# Altium PCB openadsb_rev_a.PcbDoc
Units mm, origin at the board's own origin, x right, y up, seen from the top; angles counter-clockwise.
Board outline 61.47 x 18.69 mm, 4 copper layers (Top Layer, Ground plane, Power plane, Bottom Layer), stack 1.565 mm thick; 87 components, 58 nets, 281 pads, 274 vias.
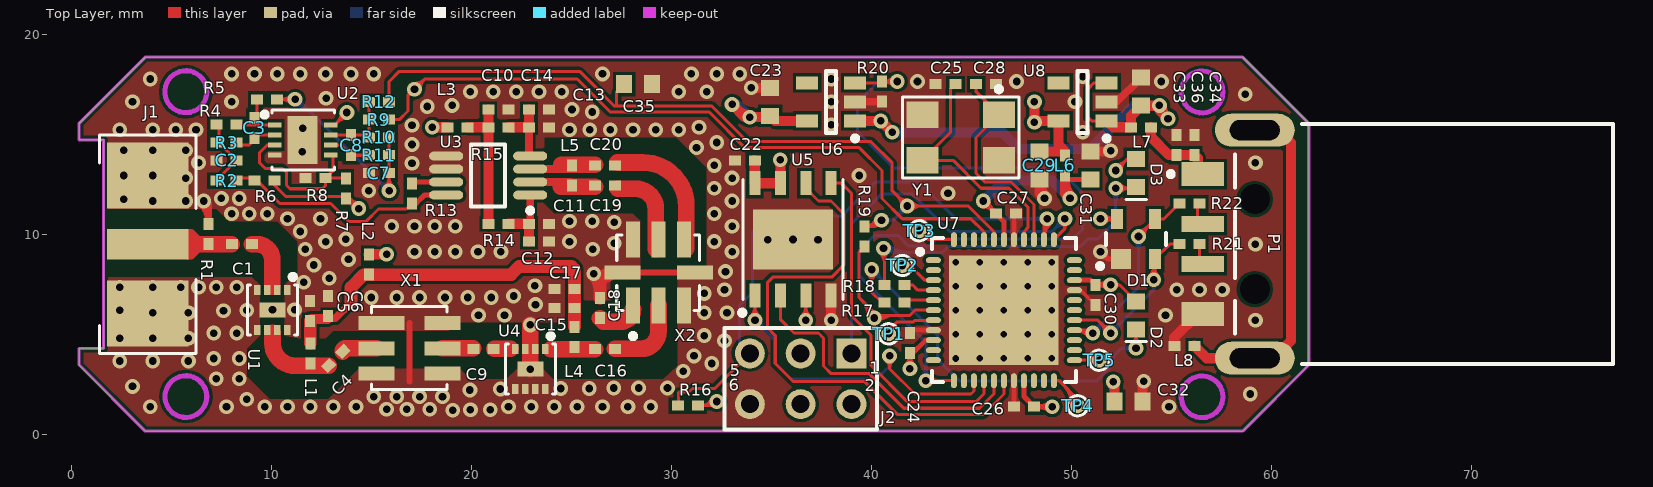
[diagram p0: Top Layer view]
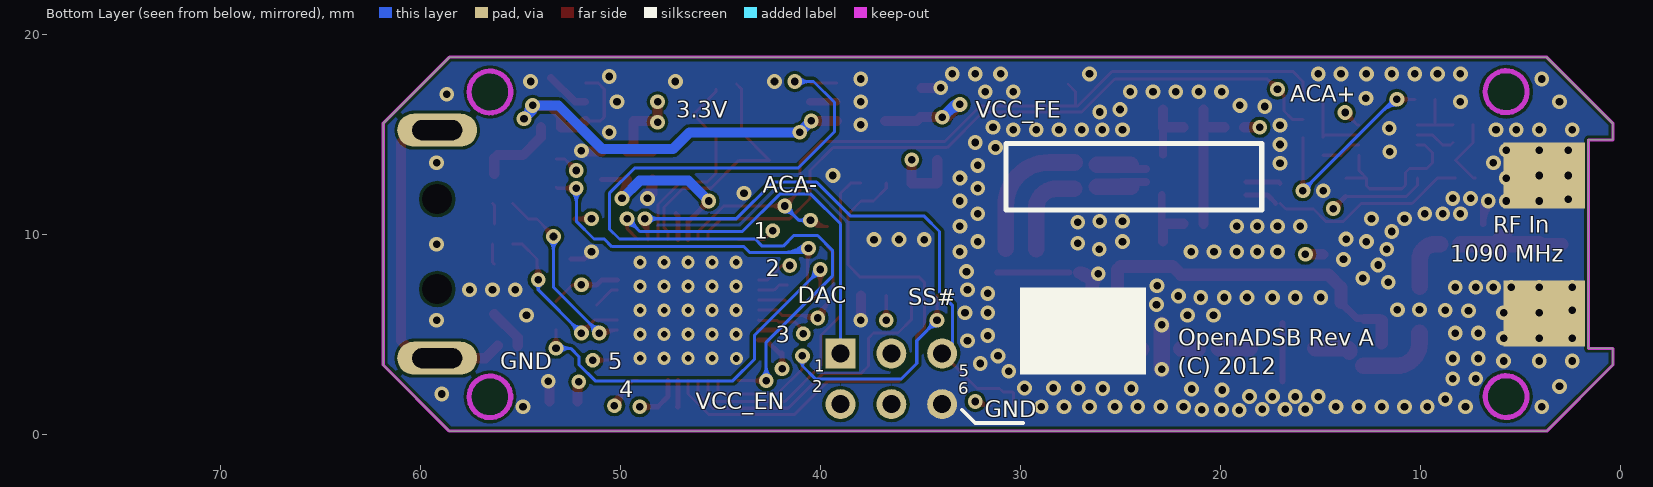
[diagram p1: Bottom Layer view, seen from below]
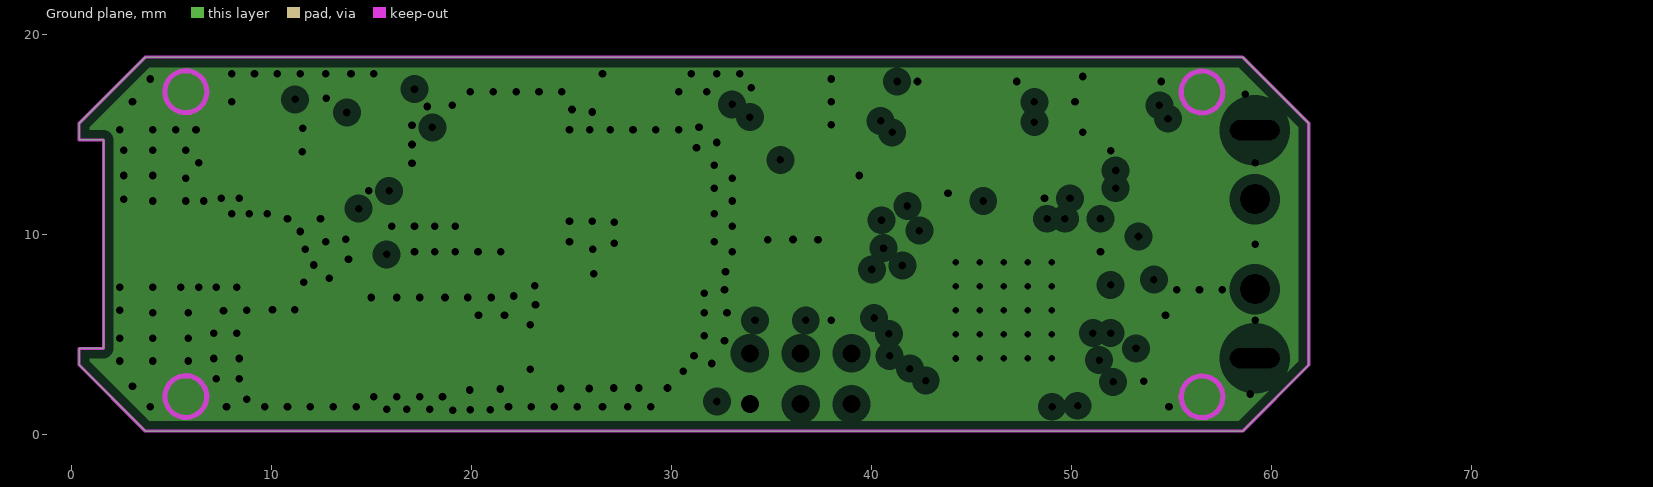
[diagram p2: Ground plane, clearances drawn from the general rule]
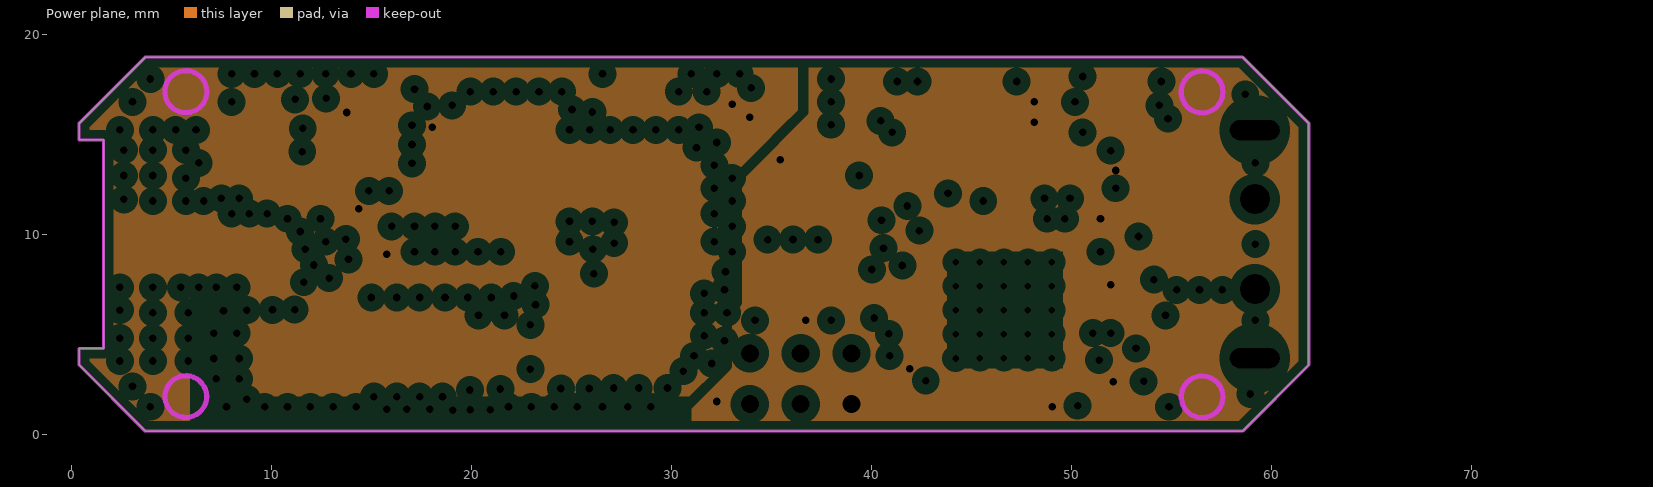
[diagram p3: Power plane, clearances drawn from the general rule]

## Layer stack, top to bottom
Top Layer: signal copper 0.0356
Dielectric: core 0.508, FR-4, Dk 4.8
Ground plane: plane copper 0.0356, net GND
Dielectric: prepreg 0.4064, FR-4, Dk 4.8
Power plane: plane copper 0.0356, net (Multiple Nets)
Dielectric: core 0.508, FR-4, Dk 4.8
Bottom Layer: signal copper 0.0356

## Board outline
0.381,3.48 0.381,4.318 1.6,4.318 1.6,14.732 0.381,14.732 0.381,15.57 3.683,18.872 58.547,18.872 61.849,15.57 61.849,3.48 58.547,0.178 3.683,0.178

## Design rules (kind name [scope] priority, off if disabled: settings)
Clearance [All] p1: gap=0.152
PlaneClearance [All] p1: clearance=0.508
PlaneConnect [All] p1: planeconnectstyle=Direct reliefexpansion=0.508 reliefentries=4 reliefconductorwidth=0.254 reliefairgap=0.254
PolygonConnect [All] p1: connectstyle=Direct reliefconductorwidth=0.254 reliefentries=4 polygonreliefangle="90 Angle" airgapwidth=0.254
RoomDefinition openadsb_rev_a [InComponentClass('openadsb_rev_a')] p1: confinementstyle=ConfineIn formatcopy=TRUE lockcomponents=FALSE outline 61.595,2.73 318.135,2.73 318.135,25.59 61.595,25.59
RoutingVias [All] p1: holewidth=0.381 width=0.737 viastyle="Through Hole" minholewidth=0.381 minwidth=0.737 maxholewidth=0.711 maxwidth=1.27
SilkscreenOverComponentPads [All] p1: minsilkscreentomaskgap=0.254
SolderMaskExpansion [All] p1: expansion=0.102
Width [All] p1: maxlimit=2.54 minlimit=0.152 preferedwidth=0.152 minimp=50.000000 maximp=50.000000 favimp=50.000000
25 further rules are at their usual default settings.

## Components (designator, comment, footprint, x,y, rotation, side; value= is the part's Value field where it differs from the comment)
C1 "100p" 0402 8.509,9.525 r0 top
C2 "12p" 0402 7.747,13.716 r0 top
C3 "4.7p" 0402 9.144,15.342 r90 top
C4 "39p" 0402 13.208,3.81 r45 top
C5 "100p" 0402 11.913,6.172 r90 top
C6 "22n" 0402 12.827,6.426 r90 top
C7 "56p" 0402 15.367,13.081 r0 top
C8 "10p" 0402 13.97,14.478 r90 top
C9 "39p" 0402 20.599,4.293 r0 top
C10 "100n" 0402 21.336,16.256 r0 top
C11 "100p" 0402 23.368,10.541 r0 top
C12 "100n" 0402 23.368,9.652 r0 top
C13 "100p" 0402 23.368,15.367 r180 top
C14 "100n" 0402 23.368,16.256 r180 top
C15 "100p" 0402 24.638,6.325 r180 top
C16 "39p" 0402 26.67,4.293 r0 top
C17 "22n" 0402 24.638,7.29 r180 top
C18 "39p" 0402 26.416,6.325 r270 top
C19 "2.7p" 0402 26.67,12.446 r180 top
C20 "2.7p" 0402 26.67,13.462 r180 top
C22 "100n" 0402 33.655,13.716 r180 top
C23 "2.2 uF" 1608[0603] 34.925,16.637 r90 top (schematic designator C35)
C24 "100n" 0402 41.91,4.572 r90 top
C25 "7 p" 0402 43.688,17.526 r0 top
C26 "100n" 0402 47.625,1.397 r180 top
C27 "100n" 0402 46.711,11.049 r0 top
C28 "7 p" 0402 45.72,17.526 r180 top
C29 "2.2 uF" 1608[0603] 48.387,13.462 r270 top
C30 "100n" 0402 51.181,6.985 r270 top
C31 "2.2 uF" 1608[0603] 50.927,13.462 r90 top
C32 "2.2 uF" 1608[0603] 52.832,1.651 r0 top
C33 "4.7 uF" 1608[0603] 53.467,17.145 r90 top
C34 "100 p" 0402 56.134,14.478 r90 top
C35 "2.2 uF" 1608[0603] 28.321,17.526 r0 top (schematic designator C23)
C36 "100n" 0402 55.245,14.478 r90 top
D1 "PACDN004-D" SOT-143-RC4_L 53.213,9.779 r90 top
D2 "GREEN" LED0603 53.213,5.969 r270 top
D3 "RED" LED0603 53.213,13.081 r270 top
J1 "SMA end-launch" SMA_ENDLAUNCH 3.81,12.065 r0 top
J2 "Header 3X2" HDR2X3 38.989,4.064 r180 top
L1 "82 nH" 0402 11.938,4.064 r90 top
L2 "Ferrite bead" 0402 14.859,8.509 r270 top
L3 "Ferrite bead" 0402 19.304,15.367 r0 top
L4 "82 nH" 0402 25.146,4.877 r90 top
L5 "8.2 nH" 0402 25.019,12.954 r270 top
L6 "Ferrite bead >220ohms @ 100MHz" 0402 49.657,13.462 r90 top
L7 "Ferrite bead >220ohms @ 100MHz" 0402 53.467,15.367 r0 top
L8 "Ferrite bead >220ohms @ 100MHz" 0402 55.626,4.445 r180 top
P1 "1470695-4" 1470695A 61.849,9.525 r0 top
R1 "10K" 0402 6.858,10.033 r90 top
R2 "6.98K" 0402 7.747,12.7 r180 top
R3 "7.87K" 0402 7.747,14.605 r0 top
R4 "6.98K" 0402 7.747,15.494 r0 top
R5 "2.26K" 0402 9.779,16.764 r180 top
R6 "5.6K" 0402 9.652,12.7 r0 top
R7 "4.7k" 0402 13.716,12.319 r90 top
R8 "4.7k" 0402 12.192,12.827 r180 top
R9 "47K" 0402 15.367,15.748 r180 top
R10 "2.26K" 0402 15.367,14.859 r0 top
R11 "1.96K" 0402 15.367,13.97 r180 top
R12 "47K" 0402 15.367,16.637 r180 top
R13 "4.7k" 0402 17.018,12.065 r90 top
R14 "10" 0402 21.336,10.541 r180 top
R15 "10" 0402 21.336,15.367 r180 top
R16 "10K" 0402 30.81,1.448 r180 top
R17 "470" 0402 41.148,6.604 r180 top
R18 "680" 0402 41.148,7.493 r180 top
R19 "100K" 0402 39.649,9.906 r270 top
R20 "47K" 0402 40.513,17.145 r90 top
R21 "27" 0402 55.88,9.538 r0 top
R22 "27" 0402 55.88,11.557 r0 top
TP1 "Testpoint" Testpoint_via 40.856,5.042 r90 top
TP2 "Testpoint" TESTPOINT_VIA 41.529,8.458 r90 top
TP3 "Testpoint" TESTPOINT_VIA 42.38,10.198 r90 top
TP4 "Testpoint" TESTPOINT_VIA 50.292,1.448 r90 top
TP5 "Testpoint" TESTPOINT_VIA 51.373,3.723 r90 top
U1 "SPF-5122Z" DFN8_2X2MM 10.045,6.239 r270 top
U2 "LT1801IDD" DFN8_3X3MM 11.557,14.732 r0 top
U3 "AD8313" MSOP-MS8_N 20.828,12.954 r180 top
U4 "SGL-0622Z" DFN8_2X2MM 22.936,3.277 r270 top
U5 "SST25VF010A" WSON-8 34.163,6.858 r90 top
U6 "TPS79942DDCR" SOT23-5AN 37.973,16.637 r180 top
U7 "ATXMEGA16A4U-MH" QFN50P700X700-44W3N 46.609,6.223 r0 top
U8 "TPS79933DDCR" SOT23-5AN 50.546,16.637 r180 top
X1 "STA1090EC" STA1090EC 14.986,6.223 r0 top
X2 "STA0232A" STA0232A 27.432,6.198 r90 top
Y1 "8.000 MHz" ABM3C 46.355,13.716 r180 top

## Footprints (in the part's own frame and the unit in brackets; to place one, negate y for a bottom-side part, rotate by r counter-clockwise, add the part's x,y. Pads: shape width x height; smd on the part's side, far side on the other; paste and mask are expansions set on the pad)
0402 [mm] "Chip Capacitor, Body 1.0x0.5mm, IPC High Density"
  rect 0.6x0.5 smd: 1(-0.5,0) 2(0.5,0)
  body extent -0.55,-0.3 0.55,0.3, height 1.3
1608[0603] [mm] "Chip Capacitor, Body 1.6x0.8mm, IPC High Density"
  rect 0.8x0.9 smd: 1(-0.7,0) 2(0.7,0)
  body extent -0.87,-0.48 0.87,0.48, height 1.3
1470695A [mm] "Connector; USB1.1, Type A, SM; 4 Position; Right Angle"
  rect 2.1x1.2 smd: 1(-5.3,3.5) 4(-5.3,-3.5)
  rect 2.1x0.8 smd: 2(-5.3,1) 3(-5.3,-1)
  oval 4x1.65 hole 1 slot 2.5 at 0 deg: 5(-2.7,-5.7) 6(-2.7,5.7)
  round 1.2 hole 1.5 unplated: MH1(-2.7,-2.25) MH2(-2.7,2.25)
  silkscreen extent -7.02,-6 15.2,6
ABM3C [mil]
  rect 63x52 smd: 1(0,-90) 2(150,-90) 3(150,0) 4(0,0)
  silkscreen extent -40,-145 190,35
DFN8_2X2MM [mm]
  rect 0.5x0.325 smd: 1(-1,0.75) 2(-1,0.25) 3(-1,-0.25) 4(-1,-0.75) 5(1,-0.75) 6(1,-0.25) 7(1,0.25) 8(1,0.75)
  rect 0.749x1.3 smd: 9(0,0)
  silkscreen extent -1.78,-1.25 1.25,1.25
DFN8_3X3MM [mm]
  rect 0.675x0.25 smd: 1(-1.41,0.75) 2(-1.41,0.25) 3(-1.41,-0.25) 4(-1.41,-0.75) 5(1.41,-0.75) 6(1.41,-0.25) 7(1.41,0.25) 8(1.41,0.75)
  rect 1.5x2.38 smd: 9(-0.004,0)
  silkscreen extent -2.03,-1.5 1.6,1.5
HDR2X3 [mm] "Connector; Header; 3x2 Position"
  rect 1.5x1.5 hole 0.9: 1(0,0)
  round 1.5 hole 0.9: 2(0,2.54) 3(2.54,0) 4(2.54,2.54) 5(5.08,0) 6(5.08,2.54)
  silkscreen extent -1.27,-1.27 6.35,3.81
LED0603 [mm] "Chip Capacitor, Body 1.6x0.8mm, IPC High Density"
  rect 0.8x0.9 smd: A(-0.7,0) K(0.7,0)
  silkscreen extent 1.32,-0.51 1.32,0.53, body extent -0.87,-0.48 0.87,0.48, height 1.3
MSOP-MS8_N [mm] "TSOP, 8-Leads, Body 3x3mm, Pitch 0.65mm, IPC Medium Density"
  oval 1.7x0.45 smd: 1(-2.1,0.975) 2(-2.1,0.325) 3(-2.1,-0.325) 4(-2.1,-0.975) 5(2.1,-0.975) 6(2.1,-0.325) 7(2.1,0.325) 8(2.1,0.975)
  silkscreen extent -2.22,-1.55 0.85,1.87, body extent -1.6,-1.6 1.6,1.6, height 1.1
QFN50P700X700-44W3N [mm] "QFN, 44-Leads, Body 7x7mm, Pitch 0.5mm, IPC Medium Density"
  oval 0.75x0.3 smd: 1(-3.525,2.5) 2(-3.525,2) 3(-3.525,1.5) 4(-3.525,1) 5(-3.525,0.5) 6(-3.525,0) 7(-3.525,-0.5) 8(-3.525,-1) 9(-3.525,-1.5) 10(-3.525,-2) 11(-3.525,-2.5) 23(3.525,-2.5) 24(3.525,-2) 25(3.525,-1.5) 26(3.525,-1) 27(3.525,-0.5) 28(3.525,0) 29(3.525,0.5) 30(3.525,1) 31(3.525,1.5) 32(3.525,2) 33(3.525,2.5)
  oval 0.3x0.75 smd: 12(-2.5,-3.525) 13(-2,-3.525) 14(-1.5,-3.525) 15(-1,-3.525) 16(-0.5,-3.525) 17(0,-3.525) 18(0.5,-3.525) 19(1,-3.525) 20(1.5,-3.525) 21(2,-3.525) 22(2.5,-3.525) 34(2.5,3.525) 35(2,3.525) 36(1.5,3.525) 37(1,3.525) 38(0.5,3.525) 39(0,3.525) 40(-0.5,3.525) 41(-1,3.525) 42(-1.5,3.525) 43(-2,3.525) 44(-2.5,3.525)
  rect 5.475x5.475 smd: 45(0,0)
  silkscreen extent -4.31,-3.6 3.6,3.6, body extent -3.57,-3.57 3.57,3.57, height 0.8
SMA_ENDLAUNCH [mil]
  rect 160x60 smd: 1(0,-100)
  rect 160x130 all layers, no hole: 2(0,-236.22) 2(0,35.43)
  silkscreen extent -95,-315 95,115
SOT23-5AN [mm] "SOT23, 5-Leads, Body 2.9x1.6mm, Pitch 0.95mm, Lead Span 2.8mm, IPC Medium Density"
  rect 1.1x0.65 smd: 1(-1.2,0.95) 2(-1.2,0) 3(-1.2,-0.95) 4(1.2,-0.95) 5(1.2,0.95)
  silkscreen extent -1.33,-1.55 0.25,1.95, body extent -0.9,-1.55 0.9,1.55, height 1.45
SOT-143-RC4_L [mm] "SOT143, 4-Leads, Body 2.9x1.3mm, Pitch 1.9mm, Lead Span 2.4mm, IPC High Density"
  rect 1x1 smd: 1(-1,0.75)
  rect 1x0.6 smd: 2(-1,-0.95) 3(1,-0.95) 4(1,0.95)
  silkscreen extent -1.47,-1.5 0.3,1.92, body extent -0.7,-1.52 0.7,1.52, height 1.22
STA0232A [mm]
  rect 1.8x0.7 smd: 1(0.254,-0.635) 2(0.254,-1.905) 3(0.254,-3.175) 5(3.556,-3.175) 6(3.556,-1.905) 7(3.556,-0.635)
  rect 0.7x1.8 smd: 4(1.905,-3.734) 8(1.905,-0.102)
  silkscreen extent -1.4,-3.96 3.79,0.18
STA1090EC [mm]
  rect 2.3x0.7 smd: 1(0.508,-0.635)
  rect 1.8x0.7 smd: 2(0.254,-1.905) 3(0.254,-3.175) 4(3.556,-3.175) 5(3.556,-1.905) 6(3.556,-0.635)
  silkscreen extent 0,-3.96 3.79,0.18
Testpoint_via [mil]
  round 29 hole 15: 1(0,0)
  silkscreen extent -20,-20 20,20
TESTPOINT_VIA [mil]
  round 29 hole 15: 1(0,0)
  silkscreen extent -20,-20 20,20
WSON-8 [mm]
  rect 1.2x0.55 smd: 1(0.1,0) 2(0.1,-1.27) 3(0.1,-2.54) 4(0.1,-3.81) 5(5.715,-3.81) 6(5.715,-2.54) 7(5.715,-1.27) 8(5.715,0)
  rect 3x4 smd: 9(2.9,-1.9)
  silkscreen extent -0.89,-4.4 5.9,0.76

## Part data
C1 C2 C3 C4 C5 C6 C7 C8 C9 C10 C11 C12 C13 C14 C15 C16 C17 C18 C19 C20 C22 C23 C24 C25 C26 C27 C28 C29 C30 C31 C32 C33 C34 C35 C36: library part Cap, "Capacitor"
D1: library part PACDN004, "ESD protection"
D2 D3: library part LED3, "Typical BLUE SiC LED"
J1: library part SMB, "SMB Straight Connector"
J2: "Header, 3-Pin, Dual row"
L1 L4 L5: library part Inductor, "Inductor"
L2 L3 L6 L7 L8: library part "Inductor Iron", "Magnetic-Core Inductor"
P1: "USB 1.1, Right Angle, SMT, A Type, Plug, 4 Position, Black"
R1 R2 R3 R4 R5 R6 R7 R8 R9 R10 R11 R12 R13 R14 R15 R16 R17 R18 R19 R20 R21 R22: library part Res1, "Resistor"
U1: library part LNA1
U2: library part LT1801
U3: "AD8313 Logarithmic Amp"
U4: library part SGL0622Z
U5: library part SERFLASH
U6 U8: library part TPS799XX
U7: library part ATXMEGA164AU
X1: library part BP_FILTER_UNBAL
X2: library part BP_FILTER_BAL2
Y1: library part XTAL_4

## Free pads (board coordinates)
  round 0 all layers, no hole: MNT(5.715,1.905) MNT(5.715,17.145) MNT(56.515,1.892) MNT(56.515,17.132)

## Via types
v1: diameter 0.737, hole 0.381, Top Layer to Bottom Layer, tented both sides, 233 vias
v2: diameter 0.66, hole 0.33, Top Layer to Bottom Layer, 25 vias
v3: diameter 0.737, hole 0.381, Top Layer to Bottom Layer, 15 vias
v4: diameter 0.737, hole 0.381, Top Layer to Bottom Layer, tented top, 1 vias

## Nets (pads, with @x,y where several pads share a name; then routed paths per layer and width w, separated by ;. In a path a pad name is that pad's centre, name@x,y a point inside that pad or via, vN(x,y) a via of type N, cw(c..) or ccw(c..) an arc to the next point about the centre after c; other vN are vias at no path point)
3V3: C22.1 C24.1 C26.1 C29.1 C30.1 C32.1 D1.4 D2.A D3.A J2.2 L6.2 R16.1 U5.3 U5.7 U5.8 U7.9 U7.19 U7.31 U8.5 | length 31
  Top Layer w0.152: 31.709,1.448 ccw(c31.709,1.914) v1@32.131,1.718 ; 31.947,1.448 ccw(c31.947,1.803) v1@32.27,1.654 ; v1@31.993,1.782 cw(c31.47,2.024) 31.47,1.448 32.047,1.448 v1(32.258,1.659) v1@32.258,1.778 ; v1@36.496,5.922 ccw(c35.998,6.42) 36.703,6.42 ccw(c37.408,6.42) v1@36.91,5.922 ; v1(36.703,5.715) U5.3 ; v1(51.943,7.493) 51.951,7.485 52.397,7.485 ; v1(52.197,13.208) 52.77,13.781 D3.A ; v1@52.197,13.5 ccw(c52.197,14.205) 52.696,13.707 ccw(c53.194,13.208) v1@52.489,13.208 ; v1@52.206,7.365 cw(c52.397,7.272) 52.397,7.485 ; v1@52.212,7.607 ccw(c52.397,7.686) 52.397,7.485 ; D2.A 52.397,7.485
  Top Layer w0.254: v1@41.739,3.473 ccw(c41.327,3.885) 41.91,3.885 ccw(c42.493,3.885) v1@42.081,3.473 ; v1(41.91,3.302) C24.1 42.045,4.072 42.696,4.723 U7.9 ; U7.19 47.609,1.913 C26.1 v1(49.022,1.397) ; v1@48.851,1.226 ccw(c48.439,0.814) 48.439,1.397 ccw(c48.439,1.98) v1@48.851,1.568 ; U7.31 50.943,7.723 C30.1 51.189,7.493 v1(51.943,7.493) ; v1(51.435,10.795) 51.451,10.779 D1.4 ; v1@51.606,10.624 cw(c51.979,10.251) D1.4@51.979,10.779 ; v1@51.606,10.966 ccw(c52.056,11.416) D1.4@52.056,10.779 ; v1@51.772,7.322 ccw(c51.36,6.91) 51.36,7.493 ccw(c51.36,8.076) v1@51.772,7.664
  Top Layer w0.508: U5.8@34.155,12.581 C22.1 ; U5.8 U5.7 v1(35.433,13.741) ; v3(48.133,16.637) v3(48.133,15.621) 48.199,15.687 U8.5 49.346,14.473 49.657,14.162 C29.1 ; v3@48.214,15.54 cw(c48.568,15.186) 48.568,15.687 ; v1@51.989,2.586 cw(c51.644,2.241) 52.132,2.241 ; v1@52.07,2.667 52.132,2.605 C32.1
  other v1: 52.07,2.642
ACA_N: C35.1 R12.1 R19.1 U7.40 | length 46.4
  Top Layer w0.152: R12.1 15.867,17.645 16.383,18.161 25.4,18.161 27.127,16.434 27.305,16.434 ; C35.1 27.24,17.145 27.24,16.499 27.305,16.434 ; R19.1@39.861,10.406 ccw(c39.861,10.927) v1@40.355,10.763 ; 40.072,10.406 ccw(c40.072,10.857) v1@40.5,10.715 ; v1@40.21,10.811 cw(c39.649,10.997) R19.1 40.175,10.406 ; v1@40.217,10.61 cw(c40.041,10.54) 40.175,10.406 ; v1@40.379,10.448 ccw(c40.308,10.272) 40.175,10.406 ; v1(40.488,10.719) 40.175,10.406 ; v3@41.491,11.43 ccw(c40.786,11.43) 41.284,11.929 ccw(c41.783,12.427) v3@41.783,11.722 ; v3@41.99,11.223 cw(c42.488,10.725) 42.488,11.43 cw(c42.488,12.135) v3@41.99,11.637 ; U7.40 46.109,10.152 44.831,11.43 v3(41.783,11.43) 41.021,12.192 41.021,13.589 39.954,14.656 33.781,14.656 32.003,16.434 27.305,16.434
  Bottom Layer w0.152: v1(40.488,10.719) 41.072,10.719 ; v1@40.721,10.544 cw(c41.072,10.281) 41.072,10.719 ; v1@40.721,10.894 ccw(c41.072,11.157) 41.072,10.719 ; v3@41.491,11.43 cw(c40.786,11.43) 41.284,10.931 cw(c41.783,10.433) v3@41.783,11.138 ; v3(41.783,11.43) 41.072,10.719
ACA_P: R9.1 U7.41 | length 37.9
  Top Layer w0.152: R9.1 16.383,15.748 16.815,16.18 16.815,16.942 ; v3@16.869,17.177 cw(c16.654,17.102) 16.815,16.942 ; v3@16.872,17.167 cw(c16.687,17.095) 16.828,16.955 ; v3@17.04,16.999 ccw(c16.968,16.814) 16.828,16.955 ; v3@17.05,16.996 ccw(c16.975,16.781) 16.815,16.942 ; v3(17.145,17.272) 16.815,16.942 ; v3@17.145,17.564 ccw(c17.145,18.269) 17.644,17.771 ccw(c18.142,17.272) v3@17.437,17.272 ; U7.41 45.609,10.144 44.958,10.795 41.529,10.795 40.513,11.811 40.513,13.208 39.37,14.351 33.655,14.351 31.877,16.129 26.924,16.129 25.273,17.78 17.653,17.78 16.828,16.954
D+: P1.3 R21.2 | length 1
  Top Layer w0.152: P1.3@56.295,8.525 56.38,8.61 R21.2
D-: P1.2 R22.2 | length 1.1
  Top Layer w0.152: P1.2@56.295,10.525 56.295,11.472 R22.2
DACB: R19.2 U7.6 | length 11.1
  Top Layer w0.152: 39.433,6.795 cw(c38.471,5.833) v3@39.831,5.833 ; R19.2 39.37,9.127 39.37,6.858 v3@40.259,5.969 ; 39.693,6.535 cw(c38.991,5.833) v3@39.984,5.833 ; 39.953,6.275 cw(c39.511,5.833) v3@40.136,5.833 ; v3(40.123,5.833) v3@40.259,5.969 ; v3@40.222,5.735 cw(c40.788,5.168) 40.788,5.969 ; v3@40.33,5.627 cw(c41.156,4.8) 41.156,5.969 ; v3@40.33,6.04 ccw(c40.501,6.211) 40.501,5.969 ; U7.6 42.164,6.223 41.91,5.969 v3@40.259,5.969
GND: C2.1 C5.2 C6.2 C7.1 C10.2 C11.2 C12.2 C13.1 C14.1 C15.2 C17.2 C18.1 C22.2 C23.2 C24.2 C25.1 C26.2 C27.2 C28.1 C29.2 C30.2 C31.2 C32.2 C33.2 C34.2 C35.2 C36.2 D1.1 J1.2 J2.6 L8.2 P1.4 R1.2 R8.2 R20.1 U1.1 U1.4 U1.5 U1.8 U1.9 U2.4 U2.9 U3.5 U3.6 U4.2 U4.3 U4.5 U4.6 U4.7 U4.8 U4.9 U5.4 U5.9 U6.2 U7.8 U7.18 U7.30 U7.38 U7.45 U8.2 X1.1 X1.3 X1.4 X1.6 X2.3 X2.4 X2.7 X2.8 Y1.2 Y1.4 | length 37.3
  Top Layer w0.152: U7.30 50.443,7.223 C30.2
  Top Layer w0.254: C24.2 42.061,5.223 U7.8 ; U7.18 47.109,1.413 C26.2 ; U7.38 47.109,10.947 C27.2 ; v1(51.435,9.144) 51.8,8.779 ; v1@51.456,8.904 cw(c51.495,8.474) 51.8,8.779 ; v1@51.675,9.123 ccw(c52.105,9.084) 51.8,8.779 ; D1.1 51.8,8.779
  Top Layer w0.305: v1@6.451,11.531 cw(c5.47,10.55) R1.2@6.858,10.55 ; v1@6.667,11.747 cw(c6.205,11.285) 6.858,11.285 ; R1.2 v1@6.858,11.557 ; 16.891,2.667 16.891,5.588 ; X2.8 X2.4
  Top Layer w0.381: U6.2 39.181,16.645 R20.1 ; U8.2 52.259,16.637 C33.2
  Top Layer w0.508: v1(33.974,17.337) C23.2 ; v1(37.973,5.715) U5.4 ; C29.2@48.387,12.7 ccw(c49.53,12.7) v1@48.722,11.892 ; C29.2 48.387,12.065 v1(48.641,11.811) ; C31.2 51.881,14.162 v1@51.943,14.224 ; C32.2 53.532,2.605 v3(53.594,2.667) ; 53.532,2.241 cw(c54.02,2.241) v3@53.675,2.586 ; L8.2 55.126,4.856 P1.4@56.295,6.025
  Top Layer w0.635: C18.1 26.416,7.468 cw(c27.051,7.468) X2.8@27.051,8.103 ; v1@26.075,8.016 cw(c25.253,7.193) 26.416,7.193 ccw(c25.253,7.193) v1@26.075,8.016 ; v1@26.083,8.009 cw(c25.679,7.393) 26.416,7.393 ccw(c25.679,7.393) v1@26.083,8.009 ; v1@26.149,8.086 ccw(c26.571,8.462) 26.883,7.991 cw(c26.571,8.462) v1@26.149,8.086
  Top Layer w0.838: v1(22.936,3.277) v1(22.936,5.486)
  other v1: 19.05,1.219 15.748,1.27 16.764,1.27 17.907,1.27 19.939,1.245 20.93,1.245 3.937,1.397 7.747,1.397 9.652,1.397 10.795,1.397 11.938,1.397 13.081,1.397 14.224,1.397 21.844,1.397 22.987,1.397 24.13,1.397 25.273,1.397 26.543,1.397 27.813,1.397 28.956,1.397 54.864,1.397 8.763,1.778 15.113,1.905 16.256,1.905 17.399,1.905 18.542,1.905 58.928,2.032 19.914,2.235 21.438,2.286 24.46,2.311 25.883,2.311 27.102,2.337 28.346,2.337 29.794,2.337 3.048,2.413 7.239,2.794 8.382,2.794 30.582,3.175 32.004,3.556 2.413,3.683 4.064,3.683 5.842,3.683 7.112,3.81 8.382,3.81 31.115,3.937 32.639,4.699 2.413,4.826 4.064,4.826 5.842,4.826 31.623,4.953 7.112,5.08 8.255,5.08 59.182,5.715 20.345,5.969 21.641,5.969 54.686,5.969 4.064,6.096 5.842,6.096 31.623,6.096 32.766,6.096 7.595,6.198 2.413,6.223 8.763,6.223 11.151,6.248 23.19,6.502 14.986,6.858 16.256,6.858 17.399,6.858 18.669,6.858 19.812,6.858 20.98,6.858 22.098,6.934 31.623,7.061 32.639,7.239 55.245,7.239 56.388,7.239 57.531,7.239 2.413,7.366 4.064,7.366 5.461,7.366 6.35,7.366 7.239,7.366 8.255,7.366 23.165,7.442 11.608,7.62 12.878,7.823 26.111,8.052 32.69,8.153 12.116,8.484 13.843,8.763 17.145,9.144 18.161,9.144 19.177,9.144 20.32,9.144 21.463,9.144 33.02,9.144 11.684,9.271 26.06,9.271 59.182,9.525 27.127,9.576 12.7,9.652 24.892,9.652 32.131,9.652 13.716,9.779 11.43,10.16 16.002,10.414 17.145,10.414 18.161,10.414 19.177,10.414 33.02,10.414 27.127,10.617 24.892,10.668 26.035,10.668 10.795,10.795 12.446,10.795 8.001,11.049 8.89,11.049 9.779,11.049 32.131,11.049 4.064,11.684 5.715,11.684 6.604,11.684 33.02,11.684 2.616,11.76 7.493,11.811 8.382,11.811 43.815,12.065 14.859,12.192 32.131,12.319 5.715,12.827 33.02,12.827 2.616,12.954 39.37,12.954 4.064,12.954 32.131,13.462 17.018,13.564 6.35,13.589 59.182,13.589 2.616,14.224 4.064,14.224 5.715,14.224 51.943,14.199 31.242,14.351 17.018,14.503 32.258,14.605 50.546,15.113 2.413,15.24 4.064,15.24 5.207,15.24 6.223,15.24 24.892,15.24 25.908,15.24 26.924,15.24 28.067,15.24 29.21,15.24 30.353,15.24 31.369,15.367 17.018,15.469 37.973,15.494 26.035,16.129 25.019,16.256 17.78,16.408 19.025,16.459 3.048,16.637 8.001,16.637 37.973,16.637 50.165,16.637 12.725,16.815 58.674,17.018 19.939,17.145 21.082,17.145 22.225,17.145 23.368,17.145 24.511,17.145 30.353,17.145 31.75,17.145 42.291,17.653 47.244,17.653 54.483,17.653 3.937,17.78 37.973,17.78 50.546,17.907 8.001,18.034 9.144,18.034 10.287,18.034 11.43,18.034 12.7,18.034 13.97,18.034 15.113,18.034 26.543,18.034 30.988,18.034 32.258,18.034 33.401,18.034
  other v2: 44.196,3.81 45.409,3.823 46.609,3.823 47.809,3.823 49.009,3.823 44.209,5.023 45.409,5.023 46.609,5.023 47.809,5.023 49.009,5.023 44.209,6.223 45.409,6.223 46.609,6.223 47.809,6.223 49.009,6.223 44.209,7.423 45.409,7.423 46.609,7.423 47.809,7.423 49.009,7.423 44.209,8.623 45.409,8.623 46.609,8.623 47.809,8.623 49.009,8.623
  other v3: 10.045,6.239 34.798,9.754 37.313,9.754 36.063,9.758 11.532,14.148 11.557,15.316
LED_GREEN#: R17.1 U7.5 | length 1.5
  Top Layer w0.152: R17.1 41.767,6.723 U7.5
LED_RED#: R18.1 U7.4 | length 1.5
  Top Layer w0.152: R18.1 42.037,7.493 42.307,7.223 U7.4
MISO: U5.2 U7.16 | length 15.5
  Top Layer w0.152: U5.2 35.433,5.765 36.118,5.08 37.338,5.08 37.592,4.826 37.592,3.429 37.973,3.048 39.878,3.048 41.605,1.321 45.39,1.321 46.109,2.04 U7.16
MOSI: U5.5 U7.15 | length 17.4
  Top Layer w0.152: U5.5 38.481,12.573 38.989,12.065 38.989,5.944 39.968,4.965 39.968,3.466 41.783,1.651 45.212,1.651 45.609,2.048 U7.15
NetC1_1: C1.1 J1.1 R1.1 | length 6.6
  Top Layer w0.508: J1.1@5.639,10.033 5.969,10.033 6.35,9.652 ; 5.842,9.017 5.969,9.017 6.35,9.398
  Top Layer w0.635: J1.1@2.921,9.525 J1.1@4.064,9.525
  Top Layer w0.838: J1.1@4.064,9.525 C1.1@8.001,9.525
NetC1_2: C1.2 U1.2 U1.3 | length 2.8
  Top Layer w0.838: C1.2 C1.2@9.264,9.525 ; C1.2@9.271,9.518 cw(c9.271,8.756) 10.033,8.763 10.033,7.391
NetC2_2: C2.2 R2.2 R3.1 R4.1 | length 3.5
  Top Layer w0.152: R2.2@7.247,12.827 7.358,12.827 C2.2 7.374,14.589 7.374,14.605 R4.1@7.374,15.494
NetC3_1: C3.1 R3.2 U2.2 | length 2
  Top Layer w0.152: R3.2@8.374,14.605 8.493,14.486 8.89,14.486 9.379,14.975 U2.2@10.169,14.975
NetC3_2: C3.2 R4.2 R5.2 U2.1 | length 3.1
  Top Layer w0.152: R4.2@8.374,15.494 8.382,15.486 9.271,15.486 ; R5.2 9.271,16.756 9.271,15.486 ; U2.1@10.176,15.482 9.275,15.482 9.271,15.486
NetC4_1: C4.1 L1.1 U1.6 U1.7 | length 4
  Top Layer w0.838: 10.045,5.08 10.045,4.588 ccw(c11.188,4.588) 11.188,3.445 C4.1@12.854,3.445
NetC4_2: C4.2 X1.2 | length 1.8
  Top Layer w0.838: C4.2 cw(c13.716,4.164) 13.716,4.318 X1.2
NetC5_1: C5.1 C6.1 C15.1 C17.1 L1.2 L2.2 L4.2 | length 18.6
  Top Layer w0.381: C6.1@12.827,5.825 13.191,5.825 13.97,6.604
  Top Layer w0.508: C5.1@12.032,5.791 C6.1@12.794,5.791
  Top Layer w0.635: L1.2 C5.1@11.938,5.698 ; 13.97,6.604 13.97,7.366 14.605,8.001 21.971,8.001 22.377,8.407 24.994,8.407 25.138,8.263 L4.2@25.138,5.402
NetC7_2: C7.2 R5.1 R10.2 R11.1 | length 14.8
  Top Layer w0.152: R5.1 v1(11.176,16.764) ; v1@10.969,16.557 ccw(c10.471,16.059) 10.471,16.764 ccw(c10.471,17.469) v1@10.969,16.971 ; v1@15.668,12.399 ccw(c15.189,12.878) C7.2@15.867,12.878 ; C7.2@15.867,12.917 ccw(c16.6,12.917) v1@16.082,12.399 ; v1(15.875,12.192) 15.867,12.2 C7.2 R10.2 R10.2@15.875,14.851
  Bottom Layer w0.152: v1@11.176,16.472 cw(c11.176,15.46) 11.891,16.176 ; v1@11.176,16.624 cw(c11.176,15.98) 11.631,16.436 ; v1@11.43,16.637 v1(15.875,12.192) ; v1@11.468,16.764 ccw(c11.867,16.764) 11.585,16.482 ; v1@15.583,12.192 ccw(c14.878,12.192) 15.376,12.691 ccw(c15.875,13.189) v1@15.875,12.484
NetC8_1: C8.1 R11.2 U2.6 | length 2
  Top Layer w0.152: U2.6@13.072,14.475 13.473,14.475 C8.1 ; C8.1@13.978,13.97 R11.2
NetC8_2: C8.2 R9.2 R10.1 R12.2 U2.7 | length 3.6
  Top Layer w0.152: U2.7@13.065,14.982 13.966,14.982 C8.2 14.748,14.978 R10.1 R9.2 R12.2
NetC9_1: C9.1 X1.5 | length 1.5
  Top Layer w0.838: X1.5 C9.1@20.066,4.318
NetC9_2: C9.2 U4.4 | length 0.8
  Top Layer w0.838: C9.2@21.133,4.293 21.946,4.293
NetC10_1: C10.1 L3.2 R14.2 R15.2 | length 6.7
  Top Layer w0.508: L3.2 R15.2 ; R14.2 C10.1
NetC11_1: C11.1 C12.1 R14.1 U3.1 | length 3.4
  Top Layer w0.381: C11.1 22.928,10.601 U3.1
  Top Layer w0.508: R14.1 C11.1 C12.1
NetC13_2: C13.2 C14.2 R15.1 U3.4 | length 3.3
  Top Layer w0.381: U3.4@22.868,13.989 C13.2
  Top Layer w0.508: R15.1 C13.2 C14.2
NetC16_1: C16.1 L4.1 U4.1 | length 2.2
  Top Layer w0.838: 23.952,4.277 C16.1@26.17,4.277
NetC16_2: C16.2 X2.2 | length 4
  Top Layer w0.838: C16.2 28.47,4.293 ccw(c28.47,5.16) 29.337,5.16 X2.2
NetC18_2: C18.2 X2.1 | length 2.1
  Top Layer w0.838: C18.2 26.594,5.647 27.44,5.647 ccw(c27.44,6.274) X2.1@28.067,6.274
NetC19_1: C19.1 X2.6 | length 4.4
  Top Layer w0.838: C19.1@27.305,12.294 28.194,12.294 cw(c28.194,11.278) 29.21,11.278 ; X2.6@29.21,9.271 29.21,11.176
NetC19_2: C19.2 L5.2 U3.2 | length 3.2
  Top Layer w0.381: U3.2@23.713,12.629 24.971,12.629 L5.2@25.146,12.454
  Top Layer w0.838: 24.46,12.395 C19.2@26.17,12.395
NetC20_1: C20.1 X2.5 | length 6.8
  Top Layer w0.838: C20.1@27.28,13.611 28.553,13.611 cw(c28.553,11.43) 30.734,11.43 X2.5@30.734,9.296
NetC20_2: C20.2 L5.1 U3.3 | length 3.2
  Top Layer w0.381: U3.3@23.713,13.279 24.971,13.279 L5.1@25.146,13.454
  Top Layer w0.838: 24.476,13.497 C20.2@26.17,13.497
NetC25_2: C25.2 U7.37 Y1.3 | length 12.5
  Top Layer w0.152: C25.2 43.934,17.272 43.934,15.105 Y1.3 44.069,13.716 45.466,12.319 46.863,12.319 47.803,11.379 47.803,10.338 47.609,10.144 U7.37 U7.37@47.625,9.764
NetC27_1: C27.1 C31.1 L6.1 U7.39 | length 11.6
  Top Layer w0.254: v1@45.576,11.443 cw(c45.576,10.86) 45.988,11.272 cw(c46.399,11.684) v1@45.817,11.684 ; v1(45.576,11.684) C27.1 46.609,10.651 U7.39 ; L6.1@49.657,12.762 C31.1
  Top Layer w0.508: L6.1@49.657,12.7 ccw(c50.8,12.7) v1@49.992,11.892 ; L6.1@49.657,12.762 49.657,12.065 v1(49.911,11.811)
  Bottom Layer w0.508: v1(45.576,11.684) 46.592,12.7 49.022,12.7 v1(49.911,11.811)
NetC28_2: C28.2 U7.36 Y1.1 | length 10.4
  Top Layer w0.152: 45.22,17.272 45.22,17.137 Y1.1 45.212,14.859 45.212,13.075 45.663,12.624 46.989,12.624 48.109,11.504 U7.36
NetC33_1: C33.1 L7.1 U6.1 U8.1 U8.3 | length 29.1
  Top Layer w0.152: U8.1 50.988,15.687 50.8,15.875 50.8,17.272 51.115,17.587 U8.3
  Top Layer w0.508: U6.1 v1(40.447,15.687) v1(41.021,15.113) ; U8.1 52.066,15.367 L7.1 52.967,15.945 C33.1 54.367,16.445 v1(54.381,16.459) ; v1@54.496,16.459 ccw(c55.324,16.459) v1@54.738,15.874 ; v1(54.813,15.799) 54.381,16.231 v1(54.381,16.459) ; v1@54.835,15.911 cw(c54.939,16.459) v1(54.381,16.459)
  Bottom Layer w0.508: v1(40.447,15.687) v1(41.021,15.113) 46.533,15.113 47.371,14.275 50.902,14.275 53.086,16.459 v1(54.381,16.459) ; v1@54.496,16.459 ccw(c55.324,16.459) v1@54.738,15.874 ; v1(54.813,15.799) 54.381,16.231 v1(54.381,16.459) ; v1@54.835,15.911 cw(c54.939,16.459) v1(54.381,16.459)
NetC34_1: C34.1 C36.1 L7.2 P1.1 | length 4.1
  Top Layer w0.508: L7.2 53.967,14.867 54.856,13.978 C36.1 C34.1 56.295,13.817 P1.1@56.295,13.025
NetD1_2: D1.2 R21.1 U7.27 | length 12.6
  Top Layer w0.152: U7.27 51.3,5.723 v1(51.943,5.08) ; v1@51.651,5.08 ccw(c50.946,5.08) 51.444,5.579 ccw(c51.943,6.077) v1@51.943,5.372 ; v1@53.895,7.954 ccw(c53.25,8.599) D1.2@54.163,8.599 ; v1@54.003,7.846 ccw(c53.617,8.232) 54.163,8.232 ; D1.2@54.163,8.305 ccw(c54.66,8.305) v1@54.309,7.954 ; v1@54.229,7.747 54.163,7.813 D1.2 54.922,9.538 R21.1
  Bottom Layer w0.152: v1(51.943,5.08) 54.102,7.239 ; v1@51.943,5.372 ccw(c51.943,6.077) 52.442,5.579 ccw(c52.94,5.08) v1@52.235,5.08 ; v1@53.955,7.495 cw(c53.806,7.239) 54.102,7.239 ; v1(54.102,7.747) 54.102,7.239 ; v1@54.249,7.495 ccw(c54.398,7.239) 54.102,7.239
NetD1_3: D1.3 R22.1 U7.26 | length 14.7
  Top Layer w0.152: U7.26@50.456,5.223 cw(c50.456,4.589) v1@50.946,4.991 ; 50.694,5.223 ccw(c50.694,5.44) v1@50.847,5.287 ; v1@50.828,4.895 ccw(c50.134,4.325) U7.26 50.911,5.223 v1(51.054,5.08) ; v1@53.34,10.198 ccw(c53.34,10.783) 53.753,10.369 ; v1@53.467,9.906 53.467,10.083 D1.3 54.602,10.779 R22.1 ; v1@53.48,9.906 cw(c53.938,9.906) 53.614,10.23 ; v1@53.632,9.906 cw(c54.458,9.906) D1.3@53.874,10.49
  Bottom Layer w0.152: v1(51.054,5.08) 53.34,7.366 53.34,9.779 v1@53.467,9.906 ; v1@51.054,5.372 ccw(c51.054,6.077) 51.553,5.579 ccw(c52.051,5.08) v1@51.346,5.08 ; v1@53.133,9.699 cw(c52.635,9.201) 53.34,9.201 cw(c54.045,9.201) v1@53.547,9.699
  other v1: 53.34,9.906
NetD2_K: D2.K R17.2 | length 24.5
  Top Layer w0.152: v1@39.798,8.048 cw(c39.3,7.55) 40.005,7.55 cw(c40.71,7.55) v1@40.212,8.048 ; v1(40.005,8.255) 40.005,7.112 40.513,6.604 R17.2 ; v1@53.006,4.525 ccw(c52.508,5.023) 53.213,5.023 ccw(c53.918,5.023) v1@53.42,4.525 ; v1(53.213,4.318) 53.213,4.445 D2.K
  Bottom Layer w0.152: v1@40.005,7.963 cw(c40.005,7.258) 40.504,7.756 cw(c41.002,8.255) v1@40.297,8.255 ; v1(40.005,8.255) 43.282,4.978 43.282,3.785 44.374,2.692 51.257,2.692 52.07,3.505 52.07,3.912 52.476,4.318 v1(53.213,4.318) ; v1@53.006,4.111 ccw(c52.508,3.613) 52.508,4.318 ccw(c52.508,5.023) v1@53.006,4.525
NetD3_K: D3.K R18.2 | length 23.1
  Top Layer w0.152: v1@40.383,9.115 cw(c39.742,8.475) 40.648,8.475 ; v1@40.49,9.223 cw(c40.11,8.843) 40.648,8.843 ; v1(40.589,9.322) 40.589,9.017 40.648,8.958 R18.2 ; 40.648,8.759 cw(c41.152,8.759) v1@40.796,9.115 ; v1(52.197,12.319) 53.151,12.319 D3.K ; v1@52.404,12.112 cw(c52.902,11.614) 52.902,12.319 cw(c52.902,13.024) v1@52.404,12.526
  Bottom Layer w0.152: v1@40.58,9.313 ccw(c41.049,9.782) 41.049,9.119 ; v1(40.589,9.322) 40.792,9.119 43.536,9.119 43.815,9.398 43.942,9.398 50.419,9.398 50.8,9.779 51.308,9.779 52.197,10.668 v1(52.197,12.319) ; v1@40.688,9.421 ccw(c41.417,10.15) 41.417,9.119 ; v1@40.796,9.528 ccw(c41.785,10.518) 41.785,9.119 ; v1@51.99,12.112 cw(c51.492,11.614) 52.197,11.614 cw(c52.902,11.614) v1@52.404,12.112
NetL8_1: L8.1 P1.5 P1.6 | length 17.7
  Top Layer w0.508: L8.1 56.746,3.825 60.086,3.825 60.96,4.699 60.96,14.605 60.34,15.225 P1.6@58.895,15.225
NetR2_1: R2.1 R6.1 R13.1 U3.8 | length 11.7
  Top Layer w0.152: R2.1@8.247,12.827 9.152,12.827 9.152,12.819 10.414,11.557 12.954,11.557 13.843,10.668 14.732,10.668 15.342,11.278 16.731,11.278 R13.1
  Top Layer w0.254: R13.1@17.235,11.565 17.649,11.979 U3.8
NetR7_2: R7.2 R8.1 U2.3 U2.5 | length 8.4
  Top Layer w0.152: U2.3@10.18,14.478 10.176,14.482 9.783,14.482 9.398,14.097 9.398,13.589 9.681,13.306 10.547,13.306 10.744,13.108 10.744,12.471 10.922,12.294 12.548,12.294 12.7,12.446 12.692,12.454 R8.1 ; U2.5@13.065,13.982 13.065,13.2 R8.1 ; R7.2 13.708,12.827 R8.1
NetR13_2: R13.2 U3.7 | length 1.7
  Top Layer w0.254: R13.2 17.082,12.629 U3.7
NetTP1_1: TP1.1 U7.7 | length 2.6
  Top Layer w0.152: TP1.1 40.856,5.22 41.275,5.639 42.088,5.639 42.164,5.715 43.076,5.715 U7.7
NetTP2_1: TP2.1 U7.3 | length 1.9
  Top Layer w0.152: TP2.1 41.91,8.458 42.645,7.723 U7.3
NetTP3_1: TP3.1 U7.44 | length 1.9
  Top Layer w0.152: TP3.1 42.83,9.748 U7.44
NetTP4_1: TP4.1 U7.22 | length 4.6
  Top Layer w0.152: U7.22 49.372,2.698 50.292,1.778 TP4.1 ; 49.56,2.51 cw(c48.498,1.448) TP4.1@50,1.448 ; 49.82,2.25 cw(c49.018,1.448) TP4.1@50.152,1.448 ; 50.08,1.99 cw(c49.538,1.448) TP4.1@50.305,1.448
NetTP5_1: TP5.1 U7.23 | length 3.2
  Top Layer w0.152: U7.23 50.942,3.723 51.246,3.723 TP5.1 ; TP5.1@51.167,3.516 ccw(c50.668,3.018) 50.668,3.723 ccw(c50.668,4.428) TP5.1@51.167,3.93 ; 50.942,3.723 ccw(c50.942,3.896) 51.102,3.832 cw(c50.942,3.896) 50.942,3.723 ; 50.942,3.723 cw(c50.942,3.55) 51.102,3.614 ccw(c50.942,3.55) 50.942,3.723
PDI_CLK: J2.5 R16.2 U7.35 | length 32.8
  Top Layer w0.152: R16.2@30.34,1.478 30.34,2.095 30.378,2.134 30.861,2.134 31.039,2.311 32.156,2.311 J2.5 J2.5@33.655,4.064 ; U7.35@48.609,9.736 cw(c49.785,9.736) v1@48.97,10.584 ; U7.35 48.609,10.636 v1(48.768,10.795) ; U7.35@48.609,10.094 cw(c49.442,10.094) v1@48.865,10.694 ; 48.609,10.452 cw(c49.098,10.452) v1@48.759,10.804
  Bottom Layer w0.152: J2.5@33.655,4.064 J2.5 33.401,4.572 33.401,6.477 34.036,7.112 34.036,10.16 34.798,10.922 38.481,10.922 40.183,12.624 42.367,12.624 44.196,10.795 v1(48.768,10.795) ; v1@48.561,10.588 ccw(c48.063,10.09) 48.063,10.795 ccw(c48.063,11.5) v1@48.561,11.002
PDI_DATA: J2.1 U7.34 | length 21.8
  Top Layer w0.152: U7.34 49.657,10.296 ; v1@49.514,10.54 cw(c49.377,10.296) 49.657,10.296 ; v1(49.657,10.795) 49.657,10.296 ; v1@49.8,10.54 ccw(c49.937,10.296) 49.657,10.296
  Bottom Layer w0.152: J2.1 38.989,10.541 40.475,12.027 42.03,12.027 43.897,10.16 49.022,10.16 v1(49.657,10.795) ; v1@49.365,10.795 cw(c48.66,10.795) 49.158,10.296 cw(c49.657,9.798) v1@49.657,10.503
SCK: U5.6 U7.17 | length 27.2
  Top Layer w0.152: U5.6 36.703,12.319 37.338,11.684 37.96,11.684 38.608,11.036 38.608,8.48 38.002,7.874 35.052,7.874 34.798,7.62 34.798,5.334 35.179,4.953 35.179,3.556 36.068,2.667 39.624,2.667 41.275,1.016 45.593,1.016 46.609,2.032 U7.17
SS#: U5.1 U7.14 | length 20.3
  Top Layer w0.152: v3@33.956,5.922 ccw(c33.458,6.42) 34.163,6.42 ccw(c34.868,6.42) v3@34.37,5.922 ; v3(34.163,5.715) U5.1 ; v1@40.704,3.715 cw(c40.35,3.302) 40.894,3.302 ; v1(40.894,3.937) 40.894,3.302 ; v1@41.084,3.715 ccw(c41.438,3.302) 40.894,3.302 ; U7.14 45.109,2.183 44.958,2.032 42.164,2.032 40.894,3.302
  Bottom Layer w0.152: v3@34.163,5.423 cw(c34.163,4.718) 34.662,5.216 cw(c35.16,5.715) v3@34.455,5.715 ; v3(34.163,5.715) 35.179,4.699 35.179,3.556 35.941,2.794 40.259,2.794 40.894,3.429 ; v1@40.747,3.685 cw(c40.598,3.429) 40.894,3.429 ; v1(40.894,3.937) 40.894,3.429 ; v1@41.041,3.685 ccw(c41.19,3.429) 40.894,3.429
VCC_EN: R20.2 U6.3 U7.12 | length 46.1
  Top Layer w0.152: U6.3 40.455,17.587 R20.2 40.521,17.653 v1(41.275,17.653) ; v1@41.068,17.446 ccw(c40.57,16.948) 40.57,17.653 ccw(c40.57,18.358) v1@41.068,17.86 ; v4(42.703,2.698) U7.12 ; v4@42.91,2.491 cw(c43.408,1.993) 43.408,2.698 cw(c43.408,3.403) v4@42.91,2.905
  Bottom Layer w0.152: v1@41.068,17.446 ccw(c40.57,16.948) 40.57,17.653 ccw(c40.57,18.358) v1@41.068,17.86 ; v1(41.275,17.653) 40.335,17.653 39.294,16.612 39.294,15.138 41.097,13.335 49.276,13.335 50.546,12.065 50.546,10.287 50.038,9.779 43.256,9.779 42.901,9.423 41.859,9.423 41.326,9.957 40.132,9.957 39.395,9.22 39.395,7.925 42.703,4.617 v4(42.703,2.698) ; v4@42.496,2.905 ccw(c41.998,3.403) 42.703,3.403 ccw(c43.408,3.403) v4@42.91,2.905
VCC_FRONTEND: C23.1 L2.1 L3.1 R6.2 R7.1 U2.8 U6.5 | length 16.8
  Top Layer w0.152: R6.2@10.152,12.827 10.152,12.454 10.693,11.913 R7.1@13.741,11.913 ; U2.8@13.065,15.482 13.151,15.482 13.767,16.098 v1(13.767,16.104) ; U2.8@13.264,15.595 ccw(c12.755,16.104) v1@13.475,16.104 ; 13.278,15.609 cw(c13.767,15.121) v1@13.767,15.811
  Top Layer w0.254: R7.1@13.741,11.913 v1(14.351,11.303) ; v1@14.11,11.303 ccw(c13.527,11.303) 13.939,11.715 ccw(c14.351,12.127) v1@14.351,11.544
  Top Layer w0.508: L2.1 14.867,9.017 v1(15.748,9.017) ; v1(18.034,15.367) L3.1 ; v3(33.02,16.51) 33.655,15.875 v3(33.909,15.875) 34.987,15.875 35.175,15.687 U6.5 ; v3@33.28,16.25 ccw(c33.909,16.878) v3@33.909,15.989
  Bottom Layer w0.508: v3@33.02,16.396 cw(c33.02,15.507) v3@33.649,16.135 ; v3(33.02,16.51) 33.274,16.51 v3(33.909,15.875) ; 33.518,16.21 cw(c33.218,15.69) v3@33.799,15.845
pads on no net: J2.3 J2.4 P1.MH1 P1.MH2 U6.4 U7.1 U7.2 U7.10 U7.11 U7.13 U7.20 U7.21 U7.24 U7.25 U7.28 U7.29 U7.32 U7.33 U7.42 U7.43 U8.4

## Polygon pours and split planes (outlines as drawn)
GND on Bottom Layer "GNDPLANE" (solid, remove dead copper, pour order 4): 61.849,18.923 61.849,0 0,0 0,19.05 1.524,19.05
GND on Top Layer "GNDPLANE" (solid, remove dead copper, pour order 3): 61.849,18.923 61.849,0 0,0 0,19.05 1.524,19.05
GND on Ground plane (split plane): 61.339,15.359 61.339,3.691 58.336,0.688 3.894,0.688 0.891,3.691 0.891,3.808 1.6,3.808 1.7,3.817 1.796,3.846 1.884,3.894 1.961,3.957 2.025,4.034 2.072,4.123 2.101,4.218 2.111,4.318 2.111,14.732 2.101,14.832 2.072,14.927 2.025,15.016 1.961,15.093 1.884,15.156 1.796,15.204 1.7,15.233 1.6,15.242 0.891,15.242 0.891,15.359 3.894,18.362 58.336,18.362
3V3 on Power plane (split plane): 61.339,15.359 61.339,3.691 58.336,0.688 30.99,0.688 30.99,1.291 32.947,3.248 32.988,3.301 33.001,3.332 33.013,3.363 33.022,3.429 33.022,5.99 33.455,6.423 33.496,6.476 33.521,6.538 33.53,6.604 33.53,12.721 34.979,14.17 35.741,14.932 36.757,15.948 36.798,16.001 36.816,16.045 36.823,16.063 36.832,16.129 36.832,18.362 58.336,18.362
VCC_FRONTEND on Power plane (split plane): 36.32,16.235 35.379,15.294 34.617,14.532 33.093,13.008 33.052,12.955 33.027,12.893 33.018,12.827 33.018,6.71 32.585,6.277 32.544,6.224 32.519,6.162 32.51,6.096 32.51,3.535 30.88,1.905 8.484,1.905 8.484,7.468 5.944,7.468 5.944,0.688 3.894,0.688 0.891,3.691 0.891,3.808 1.6,3.808 1.7,3.817 1.796,3.846 1.884,3.894 1.961,3.957 2.025,4.034 2.072,4.123 2.101,4.218 2.111,4.318 2.111,14.732 2.101,14.832 2.072,14.927 2.025,15.016 1.961,15.093 1.884,15.156 1.796,15.204 1.7,15.233 1.6,15.242 0.891,15.242 0.891,15.359 3.894,18.362 36.32,18.362

## Keep-outs
Keep-Out Layer:
  circle w0.254: c56.515,17.132 r1.045
  circle w0.254: c56.515,1.892 r1.043
  circle w0.254: c5.715,1.905 r1.043
  circle w0.254: c5.715,17.145 r1.049
  lines w0.152: 0.381,3.48 3.683,0.178 58.547,0.178 61.849,3.48 61.849,15.57 58.547,18.872 3.683,18.872 0.381,15.57 0.381,14.732 1.6,14.732 1.6,4.318 0.381,4.318 0.381,3.48

## Other copper
Top Layer:
  pour cut-out: 1.6,11.303 7.239,11.303 7.874,10.668 10.287,10.668 11.303,9.652 11.303,8.128 10.668,7.493 10.668,4.953 11.303,4.826 12.7,4.826 13.081,5.207 18.847,5.207 19.253,5.613 25.654,5.613 25.654,6.731 26.924,6.731 26.924,7.772 28.423,7.772 28.423,10.693 28.067,11.049 24.13,11.049 23.622,11.557 23.622,14.859 30.226,14.859 31.75,13.335 31.75,8.382 30.302,8.382 30.302,3.454 29.591,2.769 24.079,2.769 23.571,3.277 22.276,3.302 21.742,2.769 19.939,2.769 19.406,3.302 14.351,3.302 12.827,1.778 9.906,1.778 8.763,2.921 8.763,4.293 9.398,4.953 9.398,7.493 9.017,7.874 1.6,7.874
Power plane (plane layer: these items are gaps in the copper):
  rectangle: 43.764,3.327 49.555,9.144
  rectangle: 5.944,0.381 8.484,7.468
  rectangle: 8.103,0.203 30.937,1.905
  rectangle: 17.145,9.144 19.05,10.414
  lines w0.508: 30.734,0.178 30.734,1.397 32.766,3.429 32.766,6.096 33.274,6.604 33.274,12.827 34.798,14.351 35.56,15.113 36.576,16.129 36.576,18.872

## Silkscreen, mask and mechanical layers (free items; w line width, h text height)
Bottom Overlay:
  rectangle: 23.724,2.997 30.023,7.366
  lines w0.178: 29.845,0.584 32.258,0.584 32.918,1.245
  lines w0.254: 17.932,11.227 30.709,11.227 30.709,14.554 17.932,14.554 17.932,11.227
  text "ACA+" at 16.51,16.637 h0.81
  text "VCC_FE" at 32.233,15.85 h0.81
  text "3.3V" at 47.193,15.85 h0.81
  text "ACA-" at 42.875,12.09 h0.81
  text "RF In" at 6.35,10.084 h0.81
  text "1" at 43.332,9.804 h0.81
  text "1090 MHz" at 8.509,8.636 h0.81
  text "2" at 42.723,7.925 h0.81
  text "DAC" at 41.123,6.579 h0.81
  text "SS#" at 35.611,6.477 h0.81
  text "3" at 42.215,4.597 h0.81
  text "OpenADSB Rev A" at 22.098,4.445 h0.81
  text "5" at 50.597,3.277 h0.81
  text "GND" at 56.007,3.277 h0.81
  text "1" at 40.31,3.15 h0.61
  text "(C) 2012" at 22.123,3.023 h0.81
  text "5" at 33.071,2.896 h0.61
  text "2" at 40.411,2.134 h0.61
  text "6" at 33.096,2.032 h0.61
  text "4" at 50.038,1.88 h0.81
  text "VCC_EN" at 46.228,1.27 h0.81
  text "GND" at 31.775,0.864 h0.81
Mechanical 1:
  circle w0.152: c53.213,5.969 r1.473
  circle w0.152: c53.213,13.081 r1.473
  circle w0.254: c5.715,1.905 r1.651
  circle w0.254: c5.715,17.145 r1.651
  circle w0.254: c56.515,17.132 r1.651
  circle w0.254: c56.515,1.892 r1.651
  lines w0.025: 2.159,1.905 50.876,1.905 ; 2.159,1.905 2.159,17.145 ; 2.159,1.905 4.064,2.921 ; 2.159,17.145 50.876,17.145 ; 2.159,17.145 4.064,16.129 ; 4.064,2.921 48.895,2.921 ; 4.064,2.921 4.064,16.129 ; 4.064,16.129 48.895,16.129 ; 48.895,2.921 48.895,16.129 ; 48.895,2.921 50.876,1.905 ; 48.895,16.129 50.876,17.145 ; 50.876,1.905 50.876,17.145
  lines w0.127: 109.872,-33.865 149.242,-33.865 ; 109.872,-30.055 149.242,-30.055 206.392,-30.055 ; 109.872,-26.245 149.242,-26.245 ; 109.872,-22.435 149.242,-22.435 ; 109.872,-14.815 206.392,-14.815 ; 132.732,-37.675 132.732,-22.435 ; 149.242,-37.675 149.242,-14.815 ; 159.402,-37.675 159.402,-30.055 ; 180.357,-37.675 180.357,-30.055 ; 191.787,-37.675 191.787,-30.055 ; 109.872,-37.675 109.872,-0.845 206.392,-0.845 206.392,-37.675 109.872,-37.675
  lines w0.152: -1.626,0.356 -1.626,18.694 ; -1.626,0.686 ccw(c0.914,0.686) 0.914,-1.854 ; -1.626,18.415 cw(c0.914,18.415) 0.914,20.955 ; 0.584,-1.854 61.595,-1.854 ; 0.635,20.955 61.595,20.955 ; 61.316,-1.854 ccw(c61.316,0.686) 63.856,0.686 ; 61.316,20.955 cw(c61.316,18.415) 63.856,18.415 ; 63.856,0.406 63.856,18.694 ; 63.856,3.556 76.835,3.556 76.835,15.494 63.856,15.494 ; 0.381,3.48 0.381,4.318 ; 0.381,3.48 3.683,0.178 ; 0.381,3.48 3.683,0.178 ; 0.381,3.48 0.381,4.318 ; 0.381,4.318 1.6,4.318 ; 0.381,4.318 1.6,4.318 ; 0.381,14.732 0.381,15.57 ; 0.381,14.732 1.6,14.732 ; 0.381,14.732 1.6,14.732 ; 0.381,14.732 0.381,15.57 ; 0.381,15.57 3.683,18.872 ; 0.381,15.57 3.683,18.872 ; 1.6,4.318 1.6,14.732 ; 1.6,4.318 1.6,14.732 ; 3.683,0.178 58.547,0.178 ; 3.683,0.178 58.547,0.178 ; 3.683,18.872 58.547,18.872 ; 3.683,18.872 58.547,18.872 ; 58.547,0.178 61.849,3.48 ; 58.547,0.178 61.849,3.48 ; 58.547,18.872 61.849,15.57 ; 58.547,18.872 61.849,15.57 ; 61.849,3.48 61.849,15.57 ; 61.849,3.48 61.849,15.57
  lines w0.254: -43.863,-40.795 210.137,-40.795 210.137,149.705 -43.863,149.705 -43.863,-40.795
  text "NOTES:  UNLESS OTHERWISE SPECIFIED" at 115.939,33.719 h0.76
  text "1. ASSEMBLE USING RoHS LEAD-FREE SOLDER PROCESS." at 117.641,31.357 h0.76
  text "2. THERMAL VIAS UNDER QFN PACKAGES SHALL BE SOLDER FILLED VIAS." at 117.692,29.122 h0.76
  text "3. ASSEMBLY SHALL CONFORM TO IPC CLASS 2 STANDARDS." at 117.819,26.709 h0.76
  text "3.1 ASSEMBLY SHALL BE PRECEEDED BY FIRST ARTICLE THERMAL PROFILE." at 120.105,24.423 h0.76
  text "3.2 ALL BOARDS MUST UNDERGO 100% VISUAL AND X-RAY INSPECTION.  X-RAY FILES MUST BE PROVIDED." at 120.015,22.225 h0.76
  text "www.openadsb.com" at 162.306,-6.985 h2.54
  text "Open ADSB Project" at 111.548,-8.973 h2.29
  text "Sunnyvale, CA USA" at 162.179,-10.668 h2.54
  text "TITLE" at 152.595,-19.311 h2.29
  text "ASSEMBLY DRAWING TOP" at 164.66,-22.486 h2.29
  text "DATE" at 135.907,-25.61 h1.78
  text "APPROVALS" at 111.32,-25.661 h1.78
  text "OpenADSB USB Stick" at 164.482,-27.515 h2.03
  text "B Kuschak" at 119.19,-29.3 h1.78
  text "04/14/12" at 135.907,-29.42 h1.78
  text "DWN" at 111.32,-29.471 h1.78
  text "SIZE" at 150.639,-32.849 h1.52
  text "DWG NO." at 161.434,-32.849 h1.52
  text "CKD" at 111.32,-33.281 h1.78
  text "REV" at 183.71,-33.281 h1.52
  text "SHEET" at 195.14,-33.281 h1.52
  text "A" at 185.208,-36.913 h1.52
  text "APVR" at 111.142,-37.04 h1.78
  text "1 OF 1" at 195.775,-37.091 h1.52
  text "A" at 153.814,-37.167 h1.52
Mechanical 2:
  lines w0.127: 109.887,-33.835 149.257,-33.835 ; 109.887,-30.025 149.257,-30.025 206.407,-30.025 ; 109.887,-26.215 149.257,-26.215 ; 109.887,-22.405 149.257,-22.405 ; 109.887,-14.785 206.407,-14.785 ; 132.747,-37.645 132.747,-22.405 ; 149.257,-37.645 149.257,-14.785 ; 159.417,-37.645 159.417,-30.025 ; 180.372,-37.645 180.372,-30.025 ; 191.802,-37.645 191.802,-30.025 ; 109.887,-37.645 109.887,-0.815 206.407,-0.815 206.407,-37.645 109.887,-37.645
  lines w0.152: 117.602,134.855 204.089,134.855 ; 117.602,137.819 204.089,137.819 ; 0.762,3.48 0.762,4.318 1.981,4.318 1.981,14.732 0.762,14.732 0.762,15.57 4.064,18.872 58.928,18.872 62.23,15.57 62.23,3.48 58.928,0.178 4.064,0.178 0.762,3.48 ; 116.078,105.74 ccw(c117.043,105.74) 117.043,104.775 204.648,104.775 ccw(c204.648,105.74) 205.613,105.74 205.613,143.815 ccw(c204.648,143.815) 204.648,144.78 117.043,144.78 ccw(c117.043,143.815) 116.078,143.815 116.078,105.74
  lines w0.254: -43.863,-40.795 210.137,-40.795 210.137,149.705 -43.863,149.705 -43.863,-40.795
  text "Layer Stack Up Detail" at 117.602,139.77 h2.01
  text "Layer" at 117.602,136.714 h0.69
  text "Gerber" at 136.177,136.714 h0.69
  text "Copper" at 145.438,136.714 h0.69
  text "Dielectric" at 155.819,136.714 h0.69
  text "Dielectric" at 166.68,136.714 h0.69
  text "Dielectric" at 181.954,136.714 h0.69
  text "Dielectric" at 191.291,136.714 h0.69
  text "Name" at 117.602,135.343 h0.69
  text "Document" at 136.177,135.343 h0.69
  text "Thickness" at 145.438,135.343 h0.69
  text "Height" at 155.819,135.343 h0.69
  text "Material" at 166.68,135.343 h0.69
  text "Constant" at 181.954,135.343 h0.69
  text "Type" at 191.291,135.343 h0.69
  text "Top Solder Mask" at 117.602,132.695 h0.97
  text "(.GTS)" at 136.177,132.695 h0.97
  text "0.4mil" at 155.819,132.695 h0.97
  text "Solder Resist" at 166.68,132.695 h0.97
  text "3.50" at 181.954,132.695 h0.97
  text "Top Layer" at 117.602,128.528 h0.97
  text "(.GTL)" at 136.177,128.528 h0.97
  text "1.4mil" at 145.438,128.528 h0.97
  text "20mil" at 155.819,126.444 h0.97
  text "FR-4 High Tg" at 166.68,126.444 h0.97
  text "4.80" at 181.954,126.444 h0.97
  text "Core" at 191.291,126.444 h0.97
  text "Ground plane" at 117.602,124.361 h0.97
  text "(.GP1)" at 136.177,124.361 h0.97
  text "1.4 mil" at 145.438,124.361 h0.97
  text "16mil" at 155.819,122.277 h0.97
  text "FR-4 High Tg" at 166.68,122.277 h0.97
  text "4.80" at 181.954,122.277 h0.97
  text "PrePreg" at 191.291,122.277 h0.97
  text "Power plane" at 117.602,120.194 h0.97
  text "(.GP2)" at 136.177,120.194 h0.97
  text "1.4 mil" at 145.438,120.194 h0.97
  text "20mil" at 155.819,118.11 h0.97
  text "FR-4 High Tg" at 166.68,118.11 h0.97
  text "4.80" at 181.954,118.11 h0.97
  text "Core" at 191.291,118.11 h0.97
  text "Bottom Layer" at 117.602,116.026 h0.97
  text "(.GBL)" at 136.177,116.026 h0.97
  text "1.4mil" at 145.438,116.026 h0.97
  text "Bottom Solder Mask" at 117.602,111.859 h0.97
  text "(.GBS)" at 136.177,111.859 h0.97
  text "0.4mil" at 155.819,111.859 h0.97
  text "Solder Resist" at 166.68,111.859 h0.97
  text "3.50" at 181.954,111.859 h0.97
  text "NOTES:  UNLESS OTHERWISE SPECIFIED" at 114.82,81.877 h0.76
  text "1. PRINTED CIRCUIT BOARD SHALL BE FABRICATED TO THE MOST" at 116.522,79.515 h0.76
  text "RECENT REVISION OF IPC-6011 AND IPC-6012, CLASS 2." at 118.427,77.61 h0.76
  text "2. BOARD MATERIAL:" at 116.522,75.705 h0.76
  text "2.1 SHALL BE CONSTRUCTED AS SPECIFIED IN STACKUP" at 119.697,73.8 h0.76
  text "3. FINISH:" at 116.522,71.641 h0.76
  text "3.1 BOARD FINISH SHALL BE RoHS-COMPLIANT HASL ON BOTH SIDES." at 119.697,69.736 h0.76
  text "3.2 SOLDER MASK TO BE LIQUID PHOTO IMAGEABLE MATTE FINISH," at 119.697,67.831 h0.76
  text "BOTH SIDES OF BOARD, COLOR GREEN, CLASS T, PER IPC-SM-840" at 122.872,65.926 h0.76
  text "3.3 ALL PLATED THROUGH HOLES SHALL HAVE A MINIMUM OF .001 COPPER PLATING." at 119.697,64.021 h0.76
  text "3.4 ALL HOLE SIZES ARE FINISHED SIZE, TOLERANCE TO BE +/- .003" at 119.697,62.116 h0.76
  text "3.5 VIAS SHALL BE TENTED AS INDICATED IN SOLDER MASK LAYERS GERBER DATA" at 119.697,60.211 h0.76
  text "4. FABRICATION TOLERANCES:" at 116.522,57.671 h0.76
  text "4.1 WARP AND TWIST SHALL NOT EXCEED 0.75% AS MEASURED PER IPC-TM-650 2.4.22." at 119.697,55.766 h0.76
  text "4.2 CONDUCTOR WIDTH AND SPACING SHALL CONFORM SUPPLIED GERBER DATA." at 119.697,53.861 h0.76
  text "4.3 LAYER TO LAYER REGISTRATION SHALL BE WITHIN .002. POSITION." at 119.697,51.956 h0.76
  text "4.5 MINIMUM ANNULAR RING TO BE .005 EXTERNAL LAYERS , .003 INTERNAL LAYERS." at 119.697,50.051 h0.76
  text "5. MARKINGS" at 116.522,47.511 h0.76
  text "5.1 SILKSCREEN WITH PERMANENT NON CONDUCTIVE WHITE EPOXY" at 119.697,45.606 h0.76
  text "BASED INK. THERE SHALL BE NO MARKINGS ON ANY SOLDERABLE COMPONENT LANDS." at 122.237,43.701 h0.76
  text "6. DIMENSIONS ARE IN MILS" at 116.515,41.285 h0.76
  text "www.openadsb.com" at 162.306,-6.985 h2.54
  text "Open ADSB Project" at 111.563,-8.943 h2.29
  text "Sunnyvale, CA USA" at 162.179,-10.668 h2.54
  text "TITLE" at 152.61,-19.281 h2.29
  text "FAB DRAWING" at 164.675,-22.456 h2.29
  text "DATE" at 135.922,-25.58 h1.78
  text "APPROVALS" at 111.335,-25.631 h1.78
  text "OpenADSB USB Stick" at 164.497,-27.485 h2.03
  text "B Kuschak" at 119.187,-29.295 h1.78
  text "04/14/12" at 135.922,-29.39 h1.78
  text "DWN" at 111.335,-29.441 h1.78
  text "SIZE" at 150.654,-32.819 h1.52
  text "DWG NO." at 161.449,-32.819 h1.52
  text "CKD" at 111.335,-33.251 h1.78
  text "REV" at 183.725,-33.251 h1.52
  text "SHEET" at 195.155,-33.251 h1.52
  text "A" at 185.223,-36.883 h1.52
  text "APVR" at 111.157,-37.01 h1.78
  text "1 OF 1" at 195.79,-37.061 h1.52
  text "A" at 153.829,-37.137 h1.52
Drill Drawing:
  text ".Legend" at -39.497,128.448 h0.81

## Dimensions
61.849,3.48 to 58.547,0.178 on Mechanical 2
58.547,18.872 to 58.547,0.178 on Mechanical 2
0.381,15.494 to 61.849,15.494 on Mechanical 2
0.381,3.48 to 3.683,0.178 on Mechanical 2

## Text inside footprints (layer, text, board x,y; h text height)
J2: Top Overlay "1" at 39.878,3.048 h0.61; Top Overlay "2" at 39.649,2.159 h0.61; Top Overlay "5" at 32.893,2.921 h0.61; Top Overlay "6" at 32.842,2.184 h0.61
P1: Mechanical 1 "Mech 2 - Clearance, move to internal plane if present" at 60.849,16.201 h0.3; Mechanical 1 "Mech 1 - Slot cut-out" at 60.849,16.701 h0.3; Mechanical 1 "Assign keep-out area to slot" at 60.849,18.201 h0.3; Mechanical 1 "Slot 1x2.5mm, PTH" at 60.849,17.201 h0.3; Mechanical 1 "Alert PCB fab to slot details" at 60.849,17.701 h0.3; Mechanical 1 "PCB Edge" at 62.322,4.352 h0.25 r90